# EAGLE board main_old (EAGLE 7.4.0)
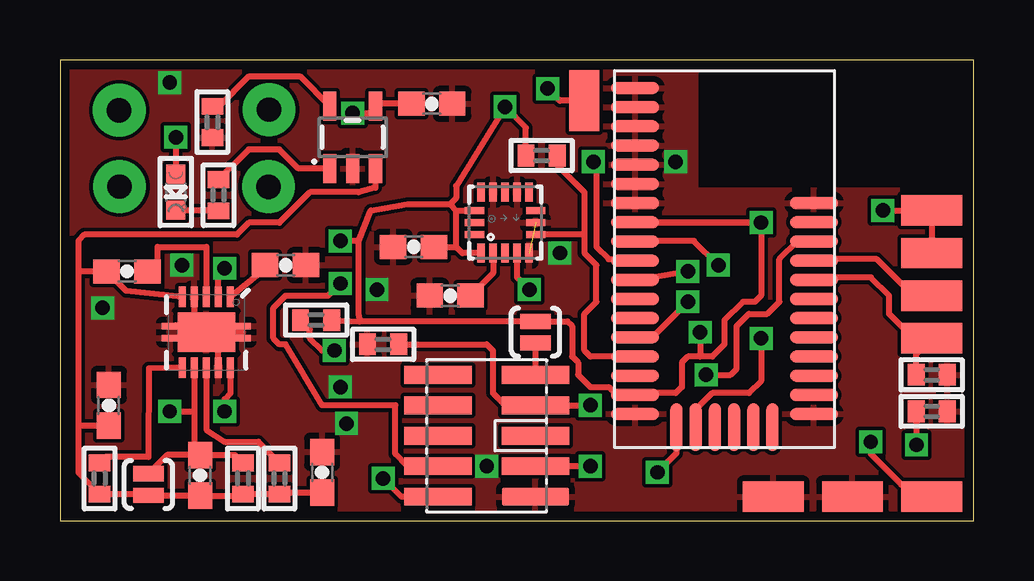
[diagram p0: board, top side]
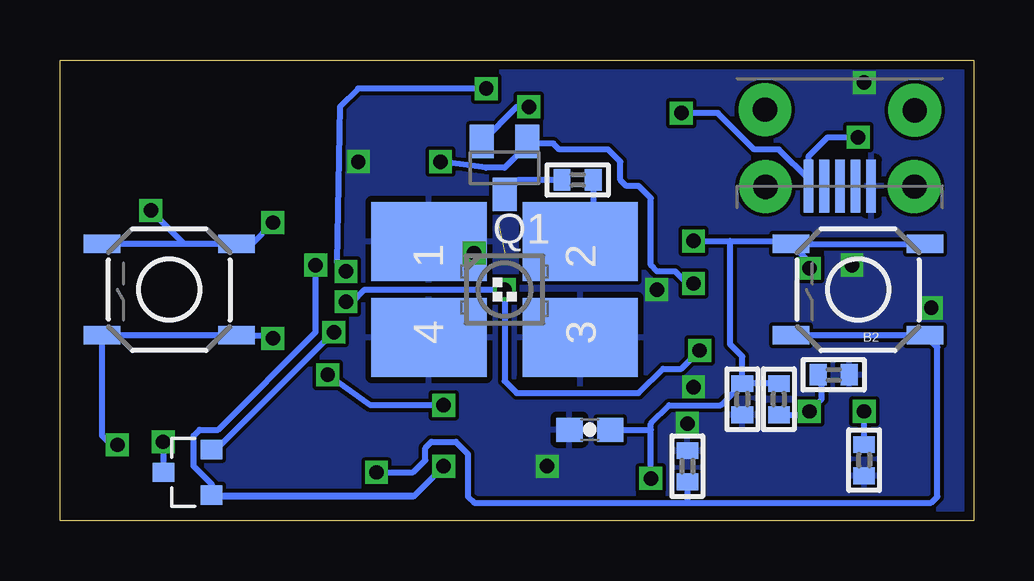
[diagram p1: board, bottom side, seen from below]

Size 38.08 x 19.23 mm. Coordinates in mm from the lower left corner, seen from the top.
Outline: 0,0 38.08,0 38.08,19.23 0,19.23 0,0
Copper layers (1*16): Top 0.0356mm / dielectric 1.5011mm / Bottom 0.0356mm
Design rules "oshpark-2layer": minimum track width 6mil, minimum drill 13mil, track to track 6mil, track to pad 6mil, pad to pad 6mil, via to via 6mil, smd to smd 6mil, copper to edge 15mil, drill to drill 6mil, minimum pad ring 7mil, minimum via ring 7mil, stop-mask expansion 4mil, vias tented up to drill 0mil, thermal gap 10mil

## Footprints (pad centres in the part's own frame; a part is rotated, then mirrored left to right if it is on the bottom)
SMD1,27-2,54 = smd 1.27 x 2.54: 1 0,0
TACTILE-SWITCH-SMD = smd 1.524 x 0.762: 1 -2.794,1.905; 2 2.794,1.905; 3 -2.794,-1.905; 4 2.794,-1.905
0603-CAP = smd 1.1 x 1: 1 -0.85,0; 2 0.85,0
0402 = smd 0.7 x 0.9: 1 -0.65,0; 2 0.65,0
CC-P05 = smd 0.74 x 2.8: 1 -2.54,-2.03; 2 -2.54,2.03; 3 -1.27,-2.03; 4 -1.27,2.03; 5 0,-2.03; 6 0,2.03; 7 1.27,-2.03; 8 1.27,2.03; 9 2.54,-2.03; 10 2.54,2.03
MICRO-B-SMT = smd 0.4 x 2.2: 1 -1.3,0; 2 -0.65,0; 3 0,0; 4 0.65,0; 5 1.3,0 | drill 1.016 pad 2.2: P$6 -3.121,3.183; P$7 -3.098,-0.027; P$8 3.122,3.16; P$9 3.108,-0.026
0603 = smd 1.1 x 1: 1 -0.85,0; 2 0.85,0
P-LCC-4-3 = smd 3.3 x 4.8: 1 -2,-3.15; 2 -2,3.15; 3 2,3.15; 4 2,-3.15
CHIPLED_0603 = smd 0.8 x 0.8: A 0,-0.75; C 0,0.75
SOT23 = smd 1 x 1.4: 1 -0.95,-1.1; 2 0.95,-1.1; 3 0,1.1
SJ_2S-NO = smd 0.635 x 1.27: 1 -0.45,0; 2 0.45,0
SOT23-5 = smd 0.55 x 1.2: 1 -0.95,-1.3; 2 0,-1.3; 3 0.95,-1.3; 4 0.95,1.3; 5 -0.95,1.3
QFN-16_0.5MM = smd 0.8 x 0.3: 1 -1.275,1; 2 -1.275,0.5; 3 -1.275,0; 4 -1.275,-0.5; 5 -1.275,-1; 9 1.275,-1; 10 1.275,-0.5; 11 1.275,0; 12 1.275,0.5; 13 1.275,1 | smd 0.3 x 0.8: 6 -0.5,-1.275; 7 0,-1.275; 8 0.5,-1.275; 14 0.5,1.275; 15 0,1.275; 16 -0.5,1.275
BLE113-A = smd 2 x 0.5: AVDD -3.725,1.538; DVDD -3.725,-5.662; GND -3.725,7.138; GND@2 -3.725,6.338; GND@3 -3.725,5.537; GND@4 -3.725,4.737; GND@5 -3.725,3.938; GND@6 -3.725,3.138; GND@7 -3.725,2.337; GND@8 -3.725,-6.463; GND@9 3.725,-6.463; GND@10 3.725,2.337; NC -3.725,-4.862; NC@2 3.725,1.538; P0_0 3.725,-0.062; P0_1 3.725,-0.863; P0_2 3.725,-1.663; P0_3 3.725,-2.462; P0_4 3.725,-3.263; P0_5 3.725,-4.062; P0_6 3.725,-4.862; P0_7 3.725,-5.662; P1_6 -3.725,-2.462; P1_7 -3.725,-1.663; P2_0 -3.725,-0.863; P2_1 -3.725,-0.062; P2_2 -3.725,0.738; RESET 3.725,0.738; SCL -3.725,-3.263; SDA -3.725,-4.062 | smd 0.5 x 2: P1_0 2,-7.013; P1_1 1.2,-7.013; P1_2 0.4,-7.013; P1_3 -0.4,-7.013; P1_4 -1.2,-7.013; P1_5 -2,-7.013
QFN-10_PAD = smd 0.297 x 0.85: 1 -1,-1.475; 2 -0.5,-1.475; 3 0,-1.475; 4 0.5,-1.475; 5 1,-1.475; 6 1,1.475; 7 0.5,1.475; 8 0,1.475; 9 -0.5,1.475; 10 -1,1.475 | smd 0.7 x 0.28: 11 -1.5,0.25; 12 -1.5,-0.25; 13 1.5,0.25; 14 1.5,-0.25 | smd 2.4 x 1.65: 15 0,0
SOT23-3 = smd 0.8 x 0.9: 1 -0.95,-1; 2 0.95,-1; 3 0,1

## Placement (x,y rotation side)
!PULSE_ENABLE  [SMD1,27-2,54]  21.84,17.53 0 top
B1  TAC_SWITCHSMD  [TACTILE-SWITCH-SMD]  33.53,9.65 180 bottom
B2  TAC_SWITCHSMD  [TACTILE-SWITCH-SMD]  4.83,9.65 180 bottom
C1  0.1uF  [0603-CAP]  16.26,9.4 180 top
C2  4.7uF  [0603-CAP]  16,3.81 180 bottom
C3  1uF  [0402]  9.65,5.08 90 bottom
C4  4.7uF  [0603-CAP]  15.49,17.4 0 top
C5  4.7uF  [0603-CAP]  10.92,2.03 270 top
C6  22uF  [0603-CAP]  14.73,11.43 0 top
C7  0.1uF  [0603-CAP]  9.4,10.67 180 top
C8  10uF  [0603-CAP]  2.03,4.83 90 top
C9  0.1uF  [0603-CAP]  5.84,1.91 90 top
J1  CC-DEBUG-PWR  [CC-P05]  17.78,3.56 90 top
JP2  [MICRO-B-SMT]  5.59,13.97 0 bottom
L1  4.7uH  [0603]  2.79,10.41 0 top
LED1  [P-LCC-4-3]  19.56,9.65 270 bottom
LED2  [CHIPLED_0603]  4.83,13.72 180 top
M_GND  [SMD1,27-2,54]  33.02,1.02 270 top
M_VDD  [SMD1,27-2,54]  36.32,12.95 90 top
PROBE_I  [SMD1,27-2,54]  36.32,7.62 90 top
PROBE_O  [SMD1,27-2,54]  36.32,1.02 270 top
PULSE_GND  [SMD1,27-2,54]  29.72,1.02 270 top
PULSE_OUT  [SMD1,27-2,54]  36.32,9.4 90 top
PULSE_VDD  [SMD1,27-2,54]  36.32,11.18 90 top
Q1  BSS84  [SOT23]  19.56,14.73 180 bottom
R1  10k  [0402]  36.32,4.57 180 top
R2  10k  [0402]  11.94,2.29 270 bottom
R3  4.7k  [0402]  10.67,8.38 0 top
R7  36  [0402]  16.51,14.22 180 bottom
R8  470  [0402]  6.6,13.59 90 top
R9  2k  [0402]  6.35,16.64 90 top
R10  10k  [0402]  1.65,1.78 270 top
R11  10k  [0402]  9.14,1.78 270 top
R12  1M  [0402]  36.32,6.1 0 top
R13  10k  [0402]  13.46,7.37 180 top
R14  4.7k  [0402]  20.07,15.24 180 top
R15  2M  [0402]  7.62,1.78 270 top
R16  220k  [0402]  4.57,2.54 270 bottom
R17  1.2M  [0402]  8.13,5.08 90 bottom
R18  220k  [0402]  5.84,6.1 180 bottom
SJ1  SOLDERJUMPERNO  [SJ_2S-NO]  19.81,7.87 270 top
SJ2  SOLDERJUMPERNO  [SJ_2S-NO]  3.68,1.52 90 top
U1  MCP73831  [SOT23-5]  12.19,16 0 top
U2  MMA8452Q  [QFN-16_0.5MM]  18.54,12.45 90 top
U3  BLE113-A  [BLE113-A]  27.69,10.92 0 top
U4  TPS61200  [QFN-10_PAD]  6.1,7.87 180 top
U$2  P-CHANNEL-MOSFET  [SOT23-3]  32.77,2.03 90 bottom

## Library data of the parts
!PULSE_ENABLE M_GND M_VDD PROBE_I PROBE_O PULSE_GND PULSE_OUT PULSE_VDD = wirepad
B1 B2 = SparkFun-Retired; PROD_ID: SWCH-08247
C1 C2 = SparkFun-Capacitors
C3 LED2 R1-R3 R7-R18 = microbuilder
C4-C9 = SparkFun-Passives
J1 = sf-bluegiga
JP2 = SparkFun-Connectors; PROD_ID: CONN-09900
L1 = SparkFun-Passives; PROD_ID: RES-07859
LED1 = led
Q1 = transistor-small-signal
SJ1 SJ2 = SparkFun-Retired
U1 = SparkFun-PowerIC; PROD_ID: IC-09995
U2 = SparkFun-Sensors; PROD_ID: IC-10769
U3 = sf-bluegiga; ANTENNA: On-module ceramic chip antenna
U4 = SparkFun-PowerIC; PROD_ID: IC-10035
U$2 = GeekAmmo

## Nets
!RESET: J1.7 R13.1 U3.RESET
GND: C1.2 C2.2 C3.1 C4.2 C5.1 C6.1 C7.1 C8.2 J1.1 JP2.5 LED1.1 LED1.3 LED1.4 M_GND.1 PULSE_GND.1 R1.1 R2.1 R9.1 R12.2 R13.2 R16.2 R18.1 U1.2 U2.5 U2.7 U2.10 U2.12 U3.GND U3.GND@2 U3.GND@3 U3.GND@4 U3.GND@5 U3.GND@6 U3.GND@7 U3.GND@8 U3.GND@9 U3.GND@10 U4.4 U4.9 U4.11 U4.12 U4.13 U4.14 U4.15
M_O: PROBE_O.1 U$2.3
N$1: Q1.3 R7.2
N$2: J1.9 SJ1.2
N$3: LED1.2 R7.1
N$5: LED2.C R8.1
N$6: R8.2 U1.1
N$7: C1.1 U2.2
N$8: C4.1 JP2.1 LED2.A U1.4
N$10: R9.2 U1.5
N$12: L1.2 U4.3
N$13: R10.1 U4.6
N$14: R11.1 U4.8
N$15: C9.2 R15.1 R16.1 SJ2.2 U4.7
N$17: C7.2 U4.1
N$18: R17.1 R18.2 U4.10
P0_0: PULSE_OUT.1 U3.P0_0
P0_1: PROBE_I.1 R12.1 U3.P0_1
P1_4: B1.1 B1.2 R1.2 U3.P1_4
P1_5: B2.1 B2.2 R2.2 U3.P1_5
P2_0: !PULSE_ENABLE.1 U3.P2_0
P2_1: J1.4 Q1.1 U3.P2_1
P2_2: J1.3 U3.P2_2 U$2.1
SCL: R3.1 U2.4 U3.SCL
SDA: R14.1 U2.6 U3.SDA
VBATT: C5.2 C8.1 C9.1 L1.1 R10.2 R11.2 R15.2 SJ2.1 U1.3 U4.5
VDD: B1.3 B1.4 B2.3 B2.4 C2.1 C3.2 C6.2 J1.2 M_VDD.1 PULSE_VDD.1 Q1.2 R3.2 R14.2 R17.2 SJ1.1 U2.1 U2.14 U3.AVDD U3.DVDD U4.2 U$2.2

## Tracks (layer width: path | path; a pad name or v marks a point on that pad's centre or on a via)
!RESET  (via drill 0.6)
  Top 0.254: v22.1,4.83 J1.7 18.54,4.83 18.03,5.33 18.03,7.11 17.78,7.37 R13.1 | v26.92,6.1 27.94,6.1 28.19,6.35 28.19,8.13 28.7,8.64 29.46,8.64 29.97,9.14 29.97,10.92 30.73,11.68 31.39,11.68 U3.RESET
  Bottom 0.254: v22.1,4.83 25.15,4.83 v26.92,6.1
GND  (via drill 0.6)  (1 unrouted)
  Top 0.254: U4.9 6.6,7.87 | 6.6,7.87 U4.15 5.85,8.38 | 6.6,7.87 7.59,7.87 U4.11 | U4.14 5.85,8.38 | U4.4 5.6,8.63 5.85,8.38
  other vias: 4.57,18.29 25.65,14.99 20.83,11.18 13.21,9.65 17.78,2.29 11.68,5.59 11.94,4.06 1.78,8.89 5.08,10.67
  pour Bottom: -0.25,19.56 -0.25,-0.51 38.35,-0.51 38.35,19.56
  pour Top: -0.25,19.3 -0.25,-0.25 38.35,-0.25 38.35,19.3 38.35,19.56 -0.25,19.56
M_O  (via drill 0.6)
  Top 0.254: v33.78,3.3 33.78,2.79 35.05,1.52 35.81,1.52 PROBE_O.1
  Bottom 0.254: U$2.3 33.77,3.29 v33.78,3.3
N$1
  Bottom 0.254: R7.2 18.97,14.22 Q1.3
N$2
  Top 0.254: SJ1.2 J1.9
N$3
  Bottom 0.254: 15.9,11.43 LED1.2 15.86,12.2 R7.1
N$5
  Top 0.254: R8.1 4.85,12.94 LED2.C
N$6
  Top 0.254: U1.1 9.94,14.7 9.14,15.49 7.86,15.49 R8.2
N$7
  Top 0.254: U2.2 18.04,10.33 C1.1
N$8  (via drill 0.6)
  Top 0.254: v12.19,17.02 12.86,17.02 U1.4 13.24,17.4 C4.1 | v4.83,16 LED2.A
  Bottom 0.254: JP2.1 6.89,14.25 | 6.89,14.25 8.13,15.49 9.14,15.49 10.67,17.02 v12.19,17.02 | 6.89,14.25 6.89,15.21 6.1,16 v4.83,16
N$10
  Top 0.254: R9.2 6.62,17.29 7.87,18.54 10,18.54 U1.5
N$12
  Top 0.254: L1.2 4.06,10.41 4.06,11.43 6.1,11.43 U4.3
N$13
  Top 0.254: U4.6 3.7,6.37 3.68,2.67 1.89,2.67 R10.1
N$14
  Top 0.254: U4.8 6.1,3.81 6.86,3.3 8.27,3.3 R11.1
N$15  (via drill 0.6)
  Top 0.254: U4.7 5.6,4.57 | 5.6,4.57 5.6,3 C9.2 | C9.2 7.29,2.75 R15.1 | C9.2 4.46,2.75 SJ2.2 | v4.57,4.57 5.6,4.57
  Bottom 0.254: R16.1 v4.57,4.57
N$17
  Top 0.254: C7.2 8.41,10.41 U4.1
N$18  (via drill 0.6)
  Top 0.254: v6.86,4.57 6.86,5.08 7.11,5.33 7.11,6.64 U4.10
  Bottom 0.254: R17.1 7,4.43 v6.86,4.57 6.35,5.08 6.35,5.95 R18.2
P0_0
  Top 0.254: PULSE_OUT.1 35.56,9.4 34.04,10.92 31.47,10.92 U3.P0_0
P0_1
  Top 0.254: R12.1 35.67,6.97 | 35.67,6.97 PROBE_I.1 | 35.67,6.97 35.67,7.51 34.54,8.64 34.54,9.4 33.78,10.16 31.51,10.16 U3.P0_1
P1_4  (via drill 0.6)
  Top 0.254: R1.2 35.67,3.19 v35.69,3.17 | v29.21,7.62 29.21,5.84 28.7,5.33 27.18,5.33 26.42,4.57 26.42,3.98 U3.P1_4
  Bottom 0.254: v35.69,3.17 35.94,3.17 36.32,3.56 B1.2 B1.1 29.34,7.75 v29.21,7.62
P1_5  (via drill 0.6)
  Top 0.254: U3.P1_5 25.69,2.83 v24.89,2.03
  Bottom 0.254: B2.2 B2.1 1.52,7.24 1.52,1.02 1.78,0.76 11.94,0.76 | v24.89,2.03 23.37,2.03 22.86,2.54 22.86,3.05 22.61,3.3 21.59,3.3 21.08,2.79 21.08,1.02 20.83,0.76 11.94,0.76 | R2.2 11.94,0.76
P2_0  (via drill 0.6)
  Top 0.254: !PULSE_ENABLE.1 20.83,17.53 v20.32,18.03 | v26.16,10.41 23.99,10.03 U3.P2_0
  Bottom 0.254: v20.32,18.03 25.65,18.03 26.42,17.27 26.54,10.79 v26.16,10.41
P2_1  (via drill 0.6)
  Top 0.254: J1.4 14.48,2.29 13.97,2.79 13.97,4.83 10.92,4.83 9.4,7.37 9.14,7.37 8.89,7.62 8.89,8.89 9.4,9.4 11.18,9.4 v11.68,9.91 | v22.23,14.99 22.23,14.86 22.35,14.73 22.35,11.43 22.86,10.92 23.9,10.92 U3.P2_1
  Bottom 0.254: v22.23,14.99 20.32,14.73 19.56,14.73 18.61,15.68 Q1.1 18.52,15.75 17.53,15.75 17.27,15.49 15.24,15.49 14.73,14.99 14.73,14.22 14.48,13.97 13.97,13.97 13.46,13.46 13.46,10.67 13.21,10.41 12.45,10.41 11.94,9.91 v11.68,9.91
P2_2  (via drill 0.6)
  Top 0.254: v22.1,2.29 J1.3 | v27.43,10.67 26.42,11.68 23.98,11.68 U3.P2_2
  Bottom 0.254: U$2.1 23.3,1.08 | v22.1,2.29 23.3,1.08 | 23.3,1.08 23.37,1.02 31.75,1.02 31.75,1.52 32.51,2.29 32.51,3.56 32.26,3.81 31.5,3.81 27.43,7.87 v27.43,10.67
SCL  (via drill 0.6)
  Top 0.254: U3.SCL 24.68,7.66 v26.16,9.14 | U2.4 19.05,10.16 v19.56,9.65 | v11.43,7.11 10.92,7.11 10.41,7.62 10.41,7.99 R3.1
  Bottom 0.254: v26.16,9.14 25.91,9.14 25.4,9.65 v19.56,9.65 19.56,5.84 19.05,5.33 13.97,5.33 12.95,6.35 12.19,6.35 v11.43,7.11
SDA
  Top 0.254: U3.SDA 22.1,6.86 21.84,7.11 21.84,8.64 22.35,9.14 22.35,10.67 21.84,11.18 21.84,11.94 | 21.84,11.94 19.82,11.94 U2.6 | R14.1 20.72,14.84 21.84,13.72 21.84,11.94
VBATT
  Top 0.254: U1.3 13.14,13.9 12.45,13.72 10.41,13.72 9.14,12.45 7.87,12.45 7.37,11.94 1.02,11.94 0.76,11.68 0.76,10.41 | 0.76,10.41 0.76,4.06 | 0.76,4.06 0.76,2.02 R10.2 3.63,1.13 SJ2.1 5.82,1.07 C9.1 7.55,1.05 R15.2 R11.2 9.2,1.18 C5.2 | C8.1 0.85,3.98 0.76,4.06 | U4.5 2.75,9.6 L1.1 0.76,10.41
VDD  (via drill 0.6)
  Top 0.254: PULSE_VDD.1 M_VDD.1 v34.29,12.95 | v29.21,12.45 23.97,12.45 U3.AVDD 29.2,12.46 v29.21,12.45 | v29.21,12.45 29.21,9.4 28.96,9.14 28.45,9.14 27.69,8.38 27.69,7.37 27.18,6.86 26.67,6.86 | 26.67,6.86 26.16,6.86 25.91,6.6 25.91,5.59 25.65,5.33 24.04,5.33 U3.DVDD 23.89,5.33 23.11,5.33 22.86,5.59 22.1,5.59 21.59,6.1 21.59,6.6 21.34,6.86 21.34,8.13 21.14,8.32 SJ1.1 12.5,8.32 | v26.67,7.87 26.67,6.86 | 16.26,13.21 16.51,12.95 | 16.51,12.95 U2.14 | U2.1 16.77,11.17 16.51,11.43 | 16.51,11.43 16.51,12.95 | 12.5,8.32 12.45,8.32 R3.2 | 12.5,8.32 12.45,8.64 12.45,11.68 | 12.45,11.68 12.95,12.95 14.48,13.21 16.26,13.21 | C6.2 16.51,11.43 | 16.26,13.21 16.51,13.46 16.51,13.97 v18.54,17.27 19.42,16.4 R14.2 | 12.45,11.68 v11.68,11.68 | J1.2 14.22,1.02 v13.46,1.78 | U4.2 6.6,10.41 v6.86,10.54
  Bottom 0.254: B1.3 B1.4 | B1.3 32.89,11.56 v34.29,12.95 | B1.3 30.1,11.56 v29.21,12.45 | U$2.2 31.56,2.98 v26.67,7.87 | B2.4 B2.3 | Q1.2 20.49,15.83 19.05,17.27 v18.54,17.27 | v11.68,11.68 10.16,11.68 | 10.16,11.68 7.75,11.68 B2.4 | v13.46,1.78 13.46,3.81 | 13.46,3.81 13.46,4.06 12.7,4.83 10.56,4.83 C3.2 | C2.1 13.46,3.81 | R17.2 C3.2 | C3.2 9.65,6.86 10.16,7.37 10.16,11.68 | v6.86,10.54 6.86,10.79 B2.4